# Altium PCB PCB_CSN_V4_2.PcbDoc
Units mil, origin at the board's own origin, x right, y up, seen from the top; angles counter-clockwise.
Board outline 3160 x 2075 mil, 2 copper layers (Top Layer, Bottom Layer); 92 components, 56 nets, 313 pads, 33 vias.
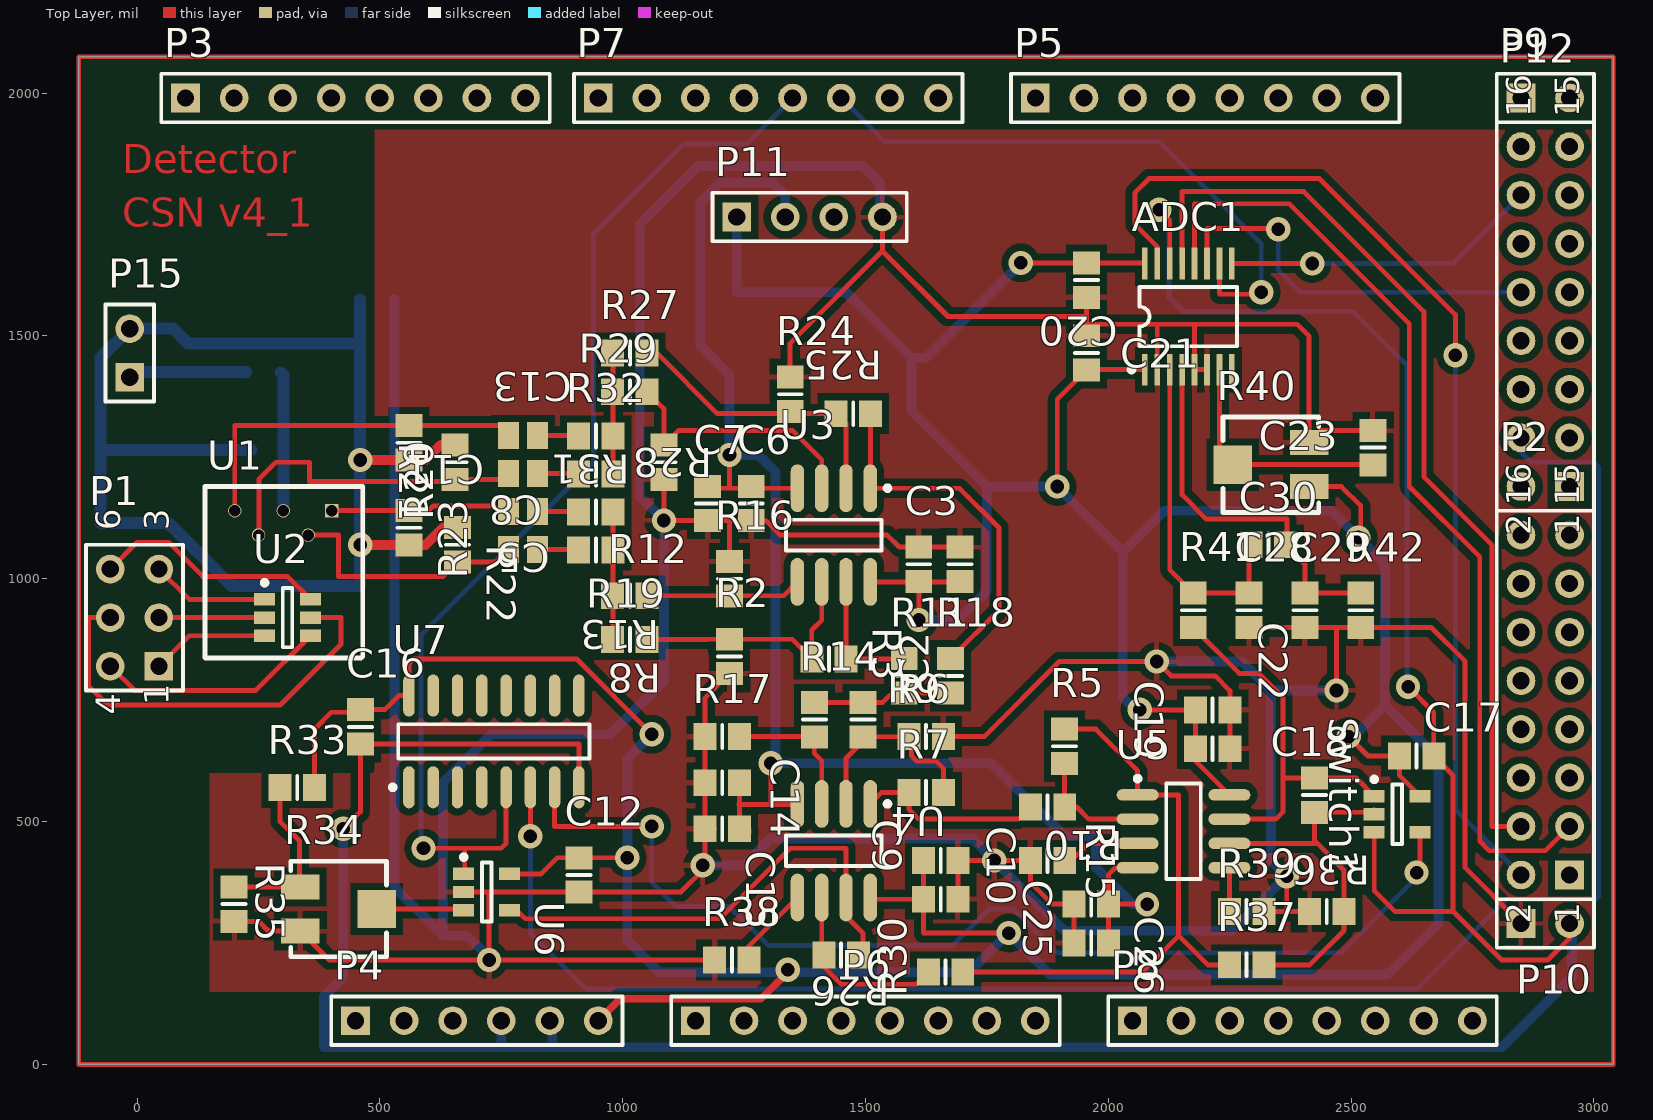
[diagram p0: Top Layer view]
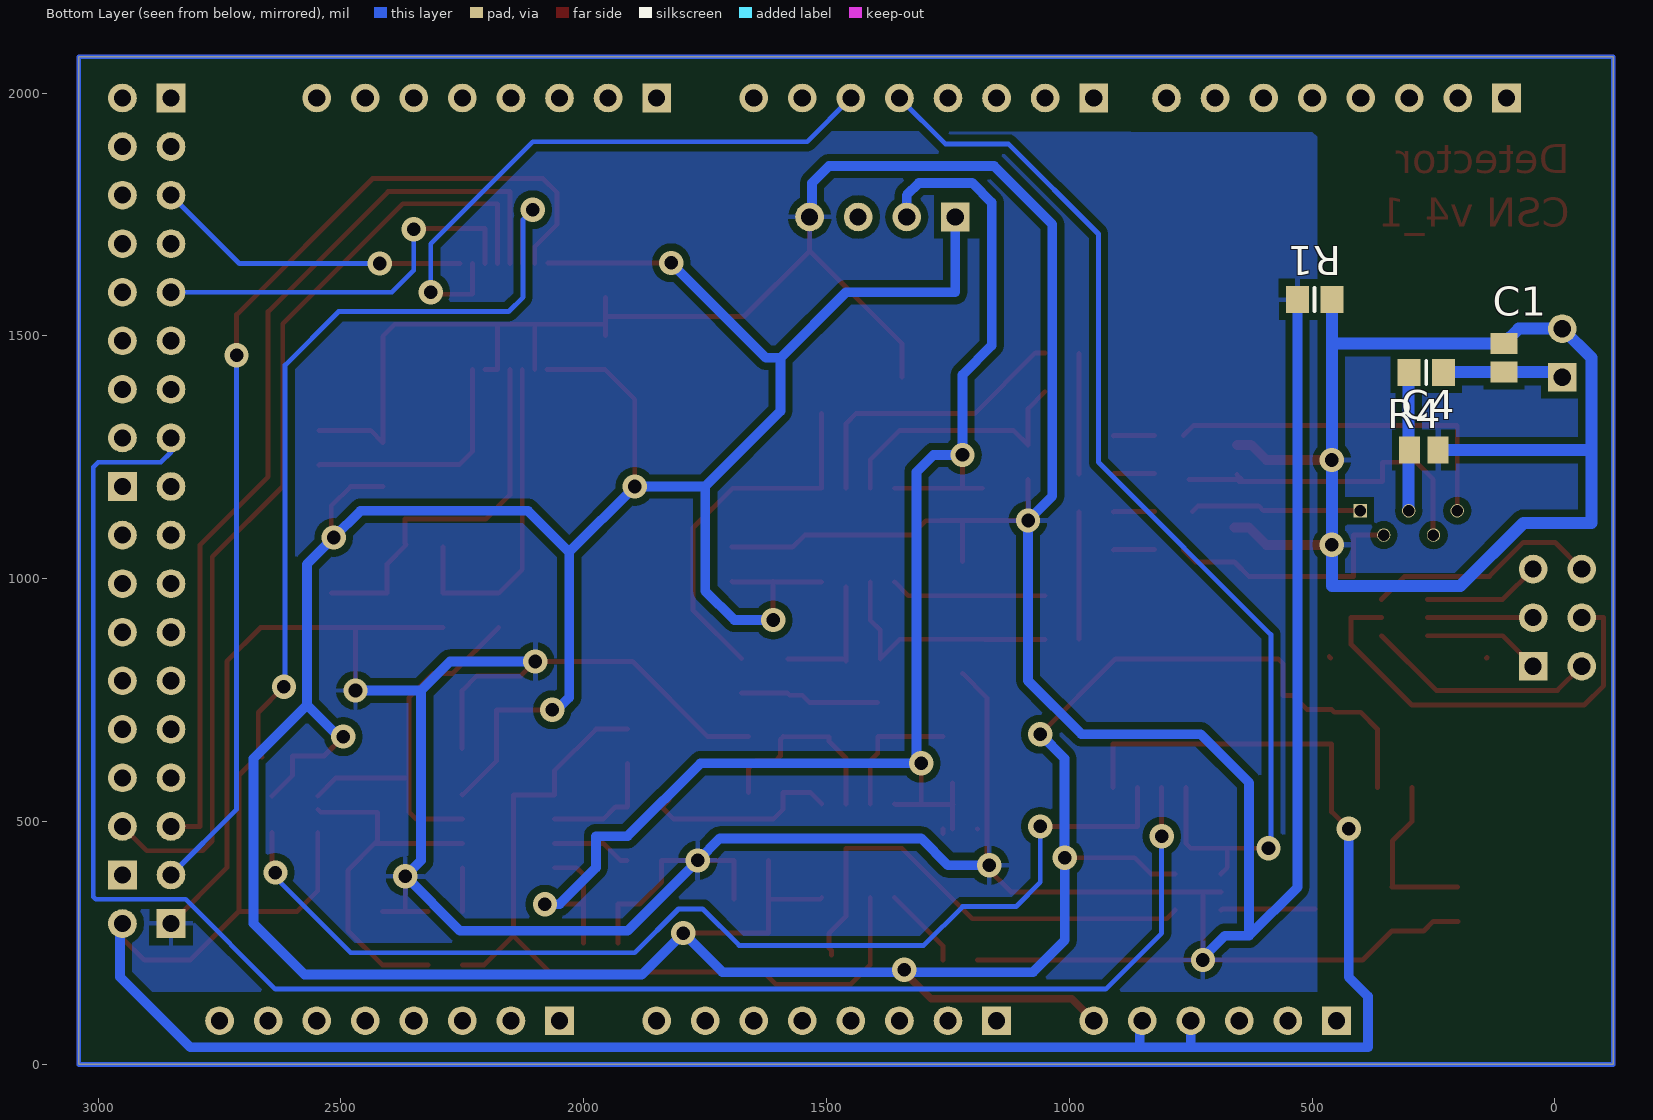
[diagram p1: Bottom Layer view, seen from below]

## Layer stack, top to bottom
Top Layer: signal copper 1.4
Dielectric: dielectric 12.6, FR-4, Dk 4.8
Bottom Layer: signal copper 1.4

## Board outline
-120,0 -120,2075 3040,2075 3040,0 -120,0

## Design rules (kind name [scope] priority, off if disabled: settings)
Clearance Clearance_1 [InPolygon] p1: gap=15
Clearance [InNetClass('All Nets') vs InNetClass('All Nets')] p2: gap=5
ComponentClearance ComponentClearance_1 [All] p1: gap=10 collisioncheckmode=3 verticalgap=10 showdistances=FALSE
PolygonConnect [All] p1: connectstyle=Relief reliefconductorwidth=10 reliefentries=4 polygonreliefangle="90 Angle"
RoutingVias [All] p1: holewidth=28 width=50 viastyle="Through Hole" minholewidth=28 minwidth=50 maxholewidth=28 maxwidth=50
SilkscreenOverComponentPads [All] p1: minsilkscreentomaskgap=10
SolderMaskExpansion [All] p1: expansion=4
Width Width_2 [(InNet('-5') OR InNet('+5') OR InNet('GND') OR InNet('DGND'))] p1: maxlimit=20 minlimit=10 preferedwidth=15 minimp=50.000000 maximp=50.000000 favimp=50.000000
Width [(InNet('70_GND') OR InNet('+70V') OR InNet('NetC4_2'))] p2: maxlimit=25 minlimit=20 preferedwidth=20 minimp=50.000000 maximp=50.000000 favimp=50.000000
Width Width_1 [All] p3: maxlimit=10 minlimit=10 preferedwidth=10
26 further rules are at their usual default settings.

## Classes and differential pairs
net class potencia: +5 -5 GND
component class Logica_ADC: C16 C17 C18 C19 C20 C21 C22 C23 C25 C26 C28 C29 C30 P2 P3 P4 P5 P6 P7 P8 P9 P10 P11 P12 R36 R37 R39 R40 R41 R42 Switch1 U7
component class Acond_Elec: C1 C2 C3 C4 C5 C6 C7 C8 C9 C10 C11 C12 C13 C14 C15 P1 P15 R1 R2 R3 R4 R5 R6 R7 R8 R9 R10 R11 R12 R13 R14 R15 R16 R17 R18 R19 R20 R21 R22 R23 R24 R25 R26 R27 R28 R29 R30 R31 R32 R33 R34 R35 R38 U1 U2 U3 U4 U5 U6
net class analog: GND NetC18_2 NetR26_2 NetR33_2 NetR34_W
net class digital: DGND NetADC1_9 NetADC1_10 NetADC1_11 NetADC1_12 NetADC1_13 NetADC1_15 NetP12_4 NetSwitch1_4

## Components (designator, comment, footprint, x,y, rotation, side; value= is the part's Value field where it differs from the comment)
ADC1 "ADS8329" PW-R-PDSO-G16 2165,1540 r0 top
C1 "Cap" C0805 105,1455 r270 bottom
C2 "Cap" 6-0805_N 1695,1030 r270 top
C3 "Cap Pol3" 6-0805_N 1610,1030 r90 top
C4 "Cap" C0805 270,1265 r0 bottom
C5 "Cap" C0805 795,1138.33 r0 top locked
C6 "Cap" 6-0805_N 1265,1155 r90 top
C7 "Cap Pol3" 6-0805_N 1175,1155 r90 top
C8 "Cap" C0805 795,1060 r0 top locked
C9 "Cap Pol3" 6-0805_N 1655,420 r0 top
C10 "Cap" 6-0805_N 1655,340 r180 top
C11 "Cap" C0805 795,1216.67 r0 top locked
C12 "Cap" 6-0805_N 910,390 r270 top
C13 "Cap" C0805 795,1295 r0 top locked
C14 "Cap" 6-0805_N 1205,580 r180 top
C15 "Cap Pol3" 6-0805_N 1205,485 r0 top
C16 "Cap" 6-0805_N 460,695 r270 top
C17 "Cap" 6-0805_N 2635,635 r180 top
C18 "Cap" 6-0805_N 2425,554.57 r90 top
C19 "Cap" 6-0805_N 2215,650 r180 top
C20 "Cap Pol3" 6-0805_N 1955,1615 r270 top
C21 "Cap Pol3" 6-0805_N 1955,1465 r90 top
C22 "Cap Pol3" 6-0805_N 2215,730 r0 top
C23 "Cap Pol3" 6-0805_N 2545,1270 r90 top
C25 "Cap" 6-0805_N 1965,330 r180 top
C26 "Cap Pol3" 6-0805_N 1965,250 r0 top
C28 "Cap" 6-0805_N 2290,935 r90 top
C29 "Cap" 6-0805_N 2405,935 r90 top
C30 "Cap" 6-0805_N 2330,1070 r180 top
P1 "Header 3X2A" HDR2X3_CEN 45,820 r90 top
P2 "Header 8X2" HDR2X8 2950,390 r90 top
P3 "Header 8" HDR1X8 100,1990 r0 top
P4 "Header 6" HDR1X6 450,90 r0 top
P5 "Header 8" HDR1X8 1850,1990 r0 top
P6 "Header 8" HDR1X8 1150,90 r0 top
P7 "Header 8" HDR1X8 950,1990 r0 top
P8 "Header 8" HDR1X8 2050,90 r0 top
P9 "Header 2" HDR1X2 2850,1990 r0 top
P10 "Header 2" HDR1X2 2850,290 r0 top
P11 "Header 4" HDR1X4 1235,1745 r0 top
P12 "Header 8X2" HDR2X8 2950,1190 r90 top
P15 "Header 2" HDR1X2 -15,1415 r90 top
R1 "Res3" 6-0805_N 495,1575 r180 bottom
R2 "Res3" 6-0805_N 1220,840 r90 top
R3 "Res3" 6-0805_N 1425,835 r180 top
R4 "Res3" 6-0805_N 265,1425 r180 bottom
R5 "Res3" 6-0805_N 1910,655 r90 top
R6 "Res3" 6-0805_N 1625,675 r180 top
R7 "Res3" 6-0805_N 1625,560 r0 top
R8 "Res3" 6-0805_N 1015,875 r0 top
R9 "Res3" 6-0805_N 1495,710 r270 top
R10 "Res3" 6-0805_N 1875,530 r0 top
R11 "Res3" 6-0805_N 1580,800 r270 top
R12 "Res3" 6-0805_N 945,1137.43 r0 top locked
R13 "Res3" 6-0805_N 1015,965 r0 top
R14 "Res3" 6-0805_N 1395,710 r270 top
R15 "Res3" 6-0805_N 1875,420 r0 top
R16 "Res3" 6-0805_N 1220,1000 r270 top
R17 "Res3" 6-0805_N 1205,675 r0 top
R18 "Res3" 6-0805_N 1675,800 r270 top
R19 "Res3" 6-0805_N 945,1059.09 r0 top locked
R20 "Res3" 6-0805_N 560,1280 r90 top locked
R21 "Res3" 6-0805_N 655,1240 r270 top locked
R22 "Res3" 6-0805_N 660,1070 r270 top locked
R23 "Res3" 6-0805_N 560,1105 r90 top locked
R24 "Res3" 6-0805_N 1345,1380 r270 top
R25 "Res3" 6-0805_N 1475,1340 r180 top
R26 "Res3" 6-0805_N 1450,225 r0 top
R27 "Res3" 6-0805_N 1015,1465 r0 top
R28 "Res3" 6-0805_N 945,1215.76 r0 top locked
R29 "0" 6-0805_N 1015,1385 r0 top
R30 "Res3" 6-0805_N 1665,190 r180 top
R31 "Res3" 6-0805_N 1085,1240 r90 top
R32 "Res3" 6-0805_N 945,1294.09 r0 top locked
R33 "Res3" 6-0805_N 330,570 r180 top
R34 "RPot SM" POT4MM-2 415,320 r0 top
R35 "Res3" 6-0805_N 200,330 r90 top
R36 "Res3" 6-0805_N 2450,315 r180 top
R37 "Res3" 6-0805_N 2285,205 r0 top
R38 "Res3" 6-0805_N 1225,215 r0 top
R39 "Res3" 6-0805_N 2285,315 r180 top
R40 "RPot SM" POT4MM-2 2335,1235 r180 top
R41 "Res3" 6-0805_N 2175,935 r90 top
R42 "Res3" 6-0805_N 2520,935 r90 top
Switch1 "SN74LVC1G66DBVR" SOT23-5_N 2595,515 r0 top
U1 "MPPC_S10985" S10985_HAM 140,1190 r0 top
U2 "LM73CIMK-0" MK06A_N 310,920 r0 top
U3 "AD8002" SO-8_M 1435,1090 r270 top
U4 "AD8002" SO-8_M 1435,440 r270 top
U5 "THS4062" S8_N 2155,480 r0 top
U6 "ADCMP600" SOT23-5_N 720,355 r0 top
U7 "SN74LS279AD" D016_N 735,665 r90 top

## Footprints (in the part's own frame and the unit in brackets; to place one, negate y for a bottom-side part, rotate by r counter-clockwise, add the part's x,y. Pads: shape width x height; smd on the part's side, far side on the other; paste and mask are expansions set on the pad)
6-0805_N [mm] "Chip Resistor, Body 2.0x1.2mm, IPC Medium Density"
  rect 1.2x1.4 smd: 1(-0.9,0) 2(0.9,0)
  silkscreen extent 0,-0.6 0,0.6, body extent -1.07,-0.7 1.07,0.7, height 0.7
C0805 [mm] "Chip Capacitor, Body 2.0x1.3mm, IPC High Density"
  rect 1.1x1.4 smd: 1(-0.75,0) 2(0.75,0)
  body extent -1.1,-0.72 1.1,0.72, height 1.4
D016_N [mm] "SOIC, 16-Leads, Body 9.9x3.9mm, Pitch 1.27mm, IPC Medium Density"
  oval 2.2x0.6 smd: 1(-2.4,4.445) 2(-2.4,3.175) 3(-2.4,1.905) 4(-2.4,0.635) 5(-2.4,-0.635) 6(-2.4,-1.905) 7(-2.4,-3.175) 8(-2.4,-4.445) 9(2.4,-4.445) 10(2.4,-3.175) 11(2.4,-1.905) 12(2.4,-0.635) 13(2.4,0.635) 14(2.4,1.905) 15(2.4,3.175) 16(2.4,4.445)
  silkscreen extent -2.52,-5 0.9,5.42, body extent -1.95,-4.95 1.95,4.95, height 1.75
HDR1X2 [mm] "Connector; Header; 2 Position"
  rect 1.5x1.5 hole 0.9: 1(0,0)
  round 1.5 hole 0.9: 2(2.54,0)
  silkscreen extent -1.27,-1.27 3.81,1.27
HDR1X4 [mm] "Connector; Header; 4 Position"
  rect 1.5x1.5 hole 0.9: 1(0,0)
  round 1.5 hole 0.9: 2(2.54,0) 3(5.08,0) 4(7.62,0)
  silkscreen extent -1.27,-1.27 8.89,1.27
HDR1X6 [mm] "Connector; Header; 6 Position"
  rect 1.5x1.5 hole 0.9: 1(0,0)
  round 1.5 hole 0.9: 2(2.54,0) 3(5.08,0) 4(7.62,0) 5(10.16,0) 6(12.7,0)
  silkscreen extent -1.27,-1.27 13.97,1.27
HDR1X8 [mm] "Connector; Header; 8 Position"
  rect 1.5x1.5 hole 0.9: 1(0,0)
  round 1.5 hole 0.9: 2(2.54,0) 3(5.08,0) 4(7.62,0) 5(10.16,0) 6(12.7,0) 7(15.24,0) 8(17.78,0)
  silkscreen extent -1.27,-1.27 19.05,1.27
HDR2X3_CEN [mm] "Connector; Header; 3x2 Position"
  rect 1.5x1.5 hole 0.9: 1(0,0)
  round 1.5 hole 0.9: 2(2.54,0) 3(5.08,0) 4(0,2.54) 5(2.54,2.54) 6(5.08,2.54)
  silkscreen extent -1.27,-1.27 6.35,3.81
HDR2X8 [mm] "Connector; Header; 8x2 Position"
  rect 1.5x1.5 hole 0.9: 1(0,0)
  round 1.5 hole 0.9: 2(0,2.54) 3(2.54,0) 4(2.54,2.54) 5(5.08,0) 6(5.08,2.54) 7(7.62,0) 8(7.62,2.54) 9(10.16,0) 10(10.16,2.54) 11(12.7,0) 12(12.7,2.54) 13(15.24,0) 14(15.24,2.54) 15(17.78,0) 16(17.78,2.54)
  silkscreen extent -1.27,-1.27 19.05,3.81
MK06A_N [mm] "SOT23, 6-Leads, Body 3.0x1.7mm, Pitch 0.95mm, Lead Span 2.9mm, IPC Medium Density"
  rect 1.1x0.65 smd: 1(-1.2,0.95) 2(-1.2,0) 3(-1.2,-0.95) 4(1.2,-0.95) 5(1.2,0) 6(1.2,0.95)
  silkscreen extent -1.32,-1.55 0.25,1.95, body extent -0.9,-1.55 0.9,1.55, height 1
POT4MM-2 [mm] "Square Trimming Potentiometer"
  rect 2x1.3 smd: CCW(-2,-1.15) CW(-2,1.15)
  rect 2x2 smd: W(2,0)
  silkscreen extent -2.5,-2.5 2.5,2.5
PW-R-PDSO-G16 [mm]
  rect 0.3x1.65 smd: 1(-2.275,-2.775) 2(-1.625,-2.775) 3(-0.975,-2.775) 4(-0.325,-2.775) 5(0.325,-2.775) 6(0.975,-2.775) 7(1.625,-2.775) 8(2.275,-2.775) 9(2.275,2.775) 10(1.625,2.775) 11(0.975,2.775) 12(0.325,2.775) 13(-0.325,2.775) 14(-0.975,2.775) 15(-1.625,2.775) 16(-2.275,2.775)
  silkscreen extent -3.1,-2.9 2.55,1.55
S8_N [mm] "SOIC, 8-Leads, Body 4.9x3.9mm, Pitch 1.27mm, IPC Medium Density"
  oval 2.2x0.6 smd: 1(-2.4,1.905) 2(-2.4,0.635) 3(-2.4,-0.635) 4(-2.4,-1.905) 5(2.4,-1.905) 6(2.4,-0.635) 7(2.4,0.635) 8(2.4,1.905)
  silkscreen extent -2.52,-2.5 0.9,2.88, body extent -2,-2.5 2,2.5, height 1.76
S10985_HAM [mm]
  rect 0.7x0.7 hole 0.6: 1(6.64,-1.27)
  round 0.7 hole 0.6: 2(5.4,-2.54) 3(4.1,-1.27) 4(2.8,-2.54) 5(1.56,-1.27)
  Top Layer lines w0.254: 0,-8.95 0.025,-8.975 ; 8.175,-8.975 8.25,-8.9
  silkscreen extent 0,-8.97 8.25,0
SO-8_M [mm] "SOIC, 8-Leads, Body 4.9x3.9mm, Pitch 1.27mm, IPC Low Density"
  oval 2.5x0.7 smd: 1(-2.45,1.905) 2(-2.45,0.635) 3(-2.45,-0.635) 4(-2.45,-1.905) 5(2.45,-1.905) 6(2.45,-0.635) 7(2.45,0.635) 8(2.45,1.905)
  silkscreen extent -2.57,-2.5 0.8,2.93, body extent -2,-2.5 2,2.5, height 1.75
SOT23-5_N [mm] "SOT23, 5-Leads, Body 2.9x1.6mm, Pitch 0.95mm, Lead Span 2.8mm, IPC Medium Density"
  rect 1.1x0.65 smd: 1(-1.2,0.95) 2(-1.2,0) 3(-1.2,-0.95) 4(1.2,-0.95) 5(1.2,0.95)
  silkscreen extent -1.32,-1.55 0.25,1.95, body extent -0.9,-1.55 0.9,1.55, height 1.45

## Part data
C1 C2 C4 C5 C6 C8 C10 C11 C12 C13 C14 C16 C17 C18 C19 C25 C28 C29 C30: "Capacitor"
C3 C7 C9 C15 C20 C21 C22 C23 C26: "Polarized Capacitor (Surface Mount)"
P1: "Header, 3-Pin, Dual row"
P2 P12: "Header, 8-Pin, Dual row"
P3 P5 P6 P7 P8: "Header, 8-Pin"
P4: "Header, 6-Pin"
P9 P10 P15: "Header, 2-Pin"
P11: "Header, 4-Pin"
R1 R2 R3 R4 R5 R6 R7 R8 R9 R10 R11 R12 R13 R14 R15 R16 R17 R18 R19 R20 R21 R22 R23 R24 R25 R26 R27 R28 R30 R31 R32 R33 R35 R36 R37 R38 R39 R41 R42: "Resistor"
R29: library part Res3, "Resistor"
R34 R40: "Square Trimming Potentiometer"
U2: "2.7V, 11- to 14- Bit Digital Temperature Sensor with 2-Wire Interface, 6-pin Tiny SOT23"
U3 U4: library part AD8002AR, "Dual 600MHz, 50mW Current Feedback Amplifier"
U5: library part LT1253CS8, "Low Cost Dual Video Amplifier"
U7: "Quadruple S-R Latches"

## Via types
v1: diameter 50, hole 28, Top Layer to Bottom Layer, 33 vias

## Nets (pads, with @x,y where several pads share a name; then routed paths per layer and width w, separated by ;. In a path a pad name is that pad's centre, name@x,y a point inside that pad or via, vN(x,y) a via of type N, cw(c..) or ccw(c..) an arc to the next point about the centre after c; other vN are vias at no path point)
70_GND: C1.1 C4.1 P15.2 R1.2 R20.1 R21.1 R22.1 R23.1 | length 2819.1
  Top Layer w20: v1(459.57,1244.57) R20.1 594.57,1244.57 625.43,1275.43 R21.1 ; v1@465,1070 465.43,1069.57 R23.1 594.57,1069.57 630.43,1105.43 R22.1
  Bottom Layer w25: C4.1@235.47,1265 -75,1265 ; R1.2 459.57,1484.57 ; -75,1265 -75,1115 65,1115 195,985 459.53,985 459.53,1484.53 ; -75,1265 -75,1455 P15.2 74.53,1515 C1.1 459.53,1484.53
  other v1: 459.57,1070
+5: ADC1.1 ADC1.16 C2.2 C3.1 C9.1 C10.2 C12.1 C16.1 C17.2 C19.2 C20.1 C21.1 C22.1 P4.6 P11.1 R33.1 R40.CW Switch1.5 U3.8 U4.8 U5.8 U6.5 U7.16 | length 9763.2
  Top Layer w10: R33.1 365.43,690.43 400,725 454.57,725 C16.1 510.43,730.43 539.49,759.49 U7.16 560,825 570,835 905,835 v1(1060,680) ; U6.5@782.24,392.4 832.4,392.4 865.43,425.43 C12.1 v1(1009.57,425.43) ; U4.8 1513.54,340 C10.2 ; U3.8 C3.1@1610,993.54 ; v1(1610,915) C3.1@1610,993.54 ; C3.1 C3.1@1610,993.54 ; C9.1 C10.2 ; C2.2 1693.98,993.54 C3.1@1610,993.54 ; v1(1795,270.43) 1619.57,270.43 C10.2 ; v1(1820,1650.43) C20.1 ADC1.16@2074.25,1650.43 ; v1@1895,1195.87 1895,1369.57 C21.1 1956.18,1430.75 ADC1.1 ; v1(2065,730) 2065,720 2070,715 2085,730 C22.1 C19.2 2179.57,624.92 U5.8 U5.8@2250.43,555.94 ; R40.CW 2480.28,1189.72 2520,1150 2520,1090 v1(2515,1085) ; v1(2495,675) 2535,635 C17.2 2599.57,595.08 Switch1.5
  Top Layer w15: P4.6 995,135 1285,135 v1@1340,190
  Bottom Layer w20: v1(1009.57,425.43) 1009.57,255.43 1075,190 1714.57,190 v1(1795,270.43) 1880.43,185 2575,185 2680,290 2680,315 ; v1@1010,425.87 1010,630 v1(1060,680) ; P11.1 1235,1590 1460,1590 1595,1455 ; v1(1610,915) 1690,915 1750,975 1750,1190 ; v1(1820,1650.43) 1624.57,1455 1595,1455 ; v1@2065,720 2030,755 2030,1055 ; v1(2495,675) 2505,675 2570,740 ; 2680,320 2680,630 2570,740 ; 1595,1455 1595,1345 1750,1190 ; 1750,1190 v1(1895,1190) 2030,1055 ; 2030,1055 2115,1140 2460,1140 v1(2515,1085) 2570,1030 2570,740
  other v1: 1340,195
+70V: C1.2 P15.1 R4.2 | length 244.1
  Bottom Layer w25: P15.1 -4.53,1425.47 C1.2 224.09,1425.47 R4.2@224.57,1425
-5: C6.2 C7.2 C14.1 C15.2 C25.1 C26.2 P11.2 U3.4 U4.4 U5.4 | length 3270.8
  Top Layer w10: C7.2@1178.98,1186.46 1220,1186.46 ; v1(1220,1255) 1220,1186.46 ; 1240,535 1240.43,535 ; C15.2 1240.43,535 ; C14.1 1240.43,535 ; C15.2@1260.43,475 C15.2@1260.43,485 ; v1(1305,620) 1305,535 ; U4.4 1358.54,535 1305,535 ; U3.4 1220,1186.46 ; C26.2 C25.1 ; U5.4 2015,405 2000.43,390.43 C25.1 ; v1(2080,330) C25.1 ; 1240.43,535 1305,535
  Bottom Layer w20: v1(1305,620) 1760,620 1910,470 1975,470 1975,405 2050,330 v1(2080,330) ; v1@1315,630 1315,1220 1280,1255 v1(1220,1255) 1220,1420 1160,1480 1160,1775 1200,1815 1310,1815 1335,1790 P11.2
DGND: ADC1.14 C16.2 C17.1 P4.4 P4.5 P10.2 Switch1.3 U7.8 | length 6699.1
  Top Layer w10: v1(425,485) 460,520 C16.2 910,659.57 U7.8 ; v1(2105,1760) 2126.61,1738.39 ADC1.14 ; Switch1.3 2547.76,357.24 2590,315 2710,315 ; v1(2617.5,777.5) 2670.43,724.57 C17.1 2710,595.43 2710,315 ; C17.1@2662.24,632.4 C17.1@2664.57,634.72 ; P10.2 2950,260 2905,215 2810,215 2710,315
  Bottom Layer w10: v1(2105,1760) 2125,1740 2125,1580 2155,1550 2505,1550 2615,1440 2615,780 v1(2617.5,777.5) v1@2620,775
  Bottom Layer w20: v1(425,485) 425,180 385,140 385,35 750,35 ; P4.4 750,35 ; P4.5@855,85 855,35 ; P10.2 2955,285 2955,180 2810,35 855,35 ; 750,35 855,35
GND: ADC1.2 ADC1.5 ADC1.6 C2.1 C3.2 C6.1 C7.1 C9.2 C10.1 C12.2 C14.2 C15.1 C19.1 C20.2 C21.2 C22.2 C23.2 C25.2 C26.1 C28.1 C29.1 P10.1 P11.4 R1.1 R2.1 R6.1 R15.1 R16.1 R17.1 R24.1 R31.1 R34.CCW R35.1 R36.2 R38.1 R39.1 R40.CCW R42.1 U6.2 | length 13603.4
  Top Layer w10: R35.1 250.43,294.57 270.28,274.72 R34.CCW 395.98,215 v1@730,215 ; U6.2@687.76,355 725,355 ; v1(725,215) v1@730,215 ; C12.2 C12.2@909.57,355 ; R31.1 v1(1085,1120) 1175,1120 1264.57,1120 C6.1 1295.43,1119.57 1325,1090 1545,1090 1569.57,1065.43 C3.2 C2.1 ; R38.1 v1@730,215 ; R2.1@1220,805 1170,755 1170,405 1120,355 C12.2@909.57,355 ; R16.1 1220,1119.78 ; R24.1 1345,1485 1535,1675 ; P11.4 1535,1675 ; R6.1 1745,675 1899.57,829.57 2070.43,829.57 ; C10.1 C9.2 v1(1765,420) R15.1 1839.57,375.43 1885,330 C25.2 C26.1 ; C21.2 C21.2@1955,1520 ; C20.2 1955,1540 ; ADC1.2 2101.02,1523.98 ; ADC1.6 ADC1.5 2177.8,1522.2 2176.02,1523.98 ; C19.1 C22.2 2250.43,769.57 2220,800 2129.57,800 v1(2100,829.57) v1@2080,829.57 ; C28.1 C29.1 2470,899.57 ; R39.1 2367.5,315 ; v1(2367.5,387.5) 2367.5,315 ; R36.2 2367.5,315 ; v1(2470,770) 2470,899.57 ; C23.2 2438.9,1305.43 R40.CCW 2413.74,1499.21 2388.98,1523.98 2176.02,1523.98 ; P10.1 2735,405 2735,830 2665.43,899.57 R42.1 2470,899.57 ; 725,355 C12.2@909.57,355 ; 725,355 725,230 735,220 v1@730,215 ; 1535,1675 1670,1540 1955,1540 ; C21.2@1955,1520 1955,1540 ; C21.2@1955,1520 1958.98,1523.98 2101.02,1523.98 ; 2070.43,829.57 v1@2080,829.57 ; 2070.43,829.57 2070,830 2079.57,830 v1@2080,829.57 ; 2101.02,1523.98 2176.02,1523.98
  Bottom Layer w20: R1.1 530.43,364.57 630,265 ; v1(725,215) 730,215 680,265 630,265 ; v1(1165,410) 1250,410 1305,465 1720,465 v1(1765,420) 1910,275 2255,275 v1(2367.5,387.5) 2335,420 2335,770 ; P11.4 1530,1750 1530,1815 1495,1850 1155,1850 1035,1730 1035,1170 v1(1085,1120) 1085,790 975,680 730,680 630,580 630,265 ; v1(2100,829.57) 2275.43,829.57 2335,770 ; v1(2470,770) 2335,770
NetADC1_3: ADC1.3 C28.2 C30.2 R41.2 | length 690.4
  Top Layer w10: ADC1.3 2126.61,1018.82 R41.2 C28.2 C30.2@2290,1065.43
NetADC1_4: ADC1.4 C29.2 C30.1 R42.2 | length 775.6
  Top Layer w10: ADC1.4 2152.2,1172.8 2202.2,1122.8 2367.8,1122.8 C30.1@2367.8,1072.36 ; C30.1 2405,1030.43 C29.2 R42.2
NetADC1_7: ADC1.7 C23.1 R40.W | length 496
  Top Layer w10: ADC1.7 2228.98,1262.28 R40.W 2544.57,1235 C23.1
NetADC1_9: ADC1.9 P12.14 | length 653.7
  Top Layer w10: ADC1.9 v1(2420,1649.25)
  Bottom Layer w10: v1(2420,1649.25) 2709.25,1649.25 P12.14
NetADC1_10: ADC1.10 P7.6 | length 1240.2
  Top Layer w10: ADC1.10 2228.98,1586.02 2311.02,1586.02 v1(2315,1590)
  Bottom Layer w10: P7.6 1540,1900 2105,1900 2315,1690 v1(2315,1590)
NetADC1_11: ADC1.11 P12.10 | length 823.3
  Top Layer w10: ADC1.11 2203.39,1721.61 2348.39,1721.61 v1(2350,1720)
  Bottom Layer w10: v1(2350,1720) 2350,1635 2395,1590 P12.10
NetADC1_12: ADC1.12 P2.3 | length 2006.6
  Top Layer w10: ADC1.12 2177.8,1772.2 2372.8,1772.2 2620,1525 2620,1190 2765,1045 2765,460 2785,440 2900,440 P2.3
NetADC1_13: ADC1.13 P2.4 | length 1926.1
  Top Layer w10: ADC1.13 2152.2,1797.2 2402.8,1797.2 2650,1550 2650,1210 2790,1070 2790,490 P2.4
NetADC1_15: ADC1.15 P2.2 | length 2162.7
  Top Layer w10: ADC1.15 2101.02,1683.98 2055,1730 2055,1795 2083.98,1823.98 2435,1823.98 2715,1543.98 v1(2715,1460)
  Bottom Layer w10: v1(2715,1460) 2715,525 P2.2
NetC4_2: C4.2 R4.1 U1.3 | length 287.5
  Bottom Layer w25: R4.1@295.43,1425 301.42,1419.01 U1.3
NetC5_1: C5.1 R23.2 U1.1 | length 353.6
  Top Layer w10: U1.1@401.85,1140.43 R23.2 600.43,1140.43 610,1150 735,1150 C5.1@746.67,1138.33
NetC5_2: C5.2 R12.1 | length 85.4
  Top Layer w10: C5.2 908.66,1138.33 R12.1
NetC8_1: C8.1 R22.2 U1.2 | length 520.7
  Top Layer w10: U1.2 415,1090 415,1005 630.43,1005 R22.2 740.04,1034.57 C8.1
NetC8_2: C8.2 R19.1 | length 85.4
  Top Layer w10: C8.2 908.66,1060 R19.1
NetC11_1: C11.1 R21.2 U1.4 | length 680.2
  Top Layer w10: U1.4@250.95,1090.71 250.95,1205 285.95,1240 355,1240 355,1200 R21.2@650.43,1200 ; R21.2@645.43,1205 R21.2@655,1214.57 ; R21.2 C11.1@753.37,1204.57
NetC11_2: C11.2 R28.1 | length 85.4
  Top Layer w10: C11.2 908.66,1216.67 R28.1
NetC13_1: C13.1 R20.2 U1.5 | length 748
  Top Layer w10: U1.5 201.42,1315.43 R20.2 745.04,1315.43 C13.1
NetC13_2: C13.2 R32.1 | length 85.4
  Top Layer w10: C13.2 908.66,1295 R32.1
NetC18_1: C18.1 R36.1 R37.2 Switch1.2 U5.6 | length 768.6
  Top Layer w10: U5.6 2430,455 ; R37.2 2415,205 2485.43,275.43 R36.1 2485.43,399.57 2430,455 ; Switch1.2@2547.76,525 2541.89,519.14 C18.1 2425,460 2430,455
NetC18_2: C18.2 R41.1 Switch1.1 U5.7 | length 799.9
  Top Layer w10: R41.1 2180,894.57 2269.57,805 2310,805 2360,755 2360,590 ; U5.7 2345,505 2360,520 2360,590 ; Switch1.1 2510.16,590 C18.2 2360,590
NetP1_1: P1.1 U2.3 | length 243.7
  Top Layer w10: P1.1 107.6,882.6 U2.3
NetP1_2: P1.2 U2.2 | length 217.8
  Top Layer w10: P1.2 U2.2
NetP1_3: P1.3 U2.1 | length 243.7
  Top Layer w10: P1.3 107.6,957.4 U2.1
NetP1_4: P1.4 U2.4 | length 479.6
  Top Layer w10: P1.4 -5,770 244.65,770 U2.4
NetP1_5: P1.5 U2.5 | length 891.1
  Top Layer w10: P1.5 -100,920 -100,780 -60,740 295,740 420,865 420,920 U2.5
NetP1_6: P1.6 U2.6 | length 483.7
  Top Layer w10: P1.6 0,1075 65,1075 135,1005 309.65,1005 U2.6
NetP7_5: P7.5 U6.1 U7.5 | length 2308.8
  Top Layer w10: v1(590,445) 750,445 760,455 U7.5 ; 675,445 675,405.16 U6.1@687.76,392.4
  Bottom Layer w10: v1(590,445) 605,445 585,465 585,885 940,1240 940,1710 1125,1895 1255,1895 P7.5
NetP12_4: P12.4 U7.6 | length 3713.8
  Top Layer w10: v1(810,470) U7.6
  Bottom Layer w10: v1(810,470) 810,270 925,155 2635,155 2820,340 3005,340 3010,345 3010,1230 3000,1240 2870.86,1240 2850,1260.86 P12.4
NetR2_2: R2.2 R3.2 R8.2 U3.6 | length 523.1
  Top Layer w10: R8.2 1174.57,875 1175,875.43 1349.13,875.43 R3.2 1389.57,894.57 1410,915 U3.6
NetR3_1: R3.1 R11.1 U3.7 | length 272.2
  Top Layer w10: R3.1@1460,830 U3.7@1460,983.11 ; R3.1 R11.1@1579.57,835
NetR5_1: R5.1 R10.2 U5.2 | length 250.2
  Top Layer w10: R5.1 1910,530.43 R10.2 1935,530 1960,505 U5.2
NetR5_2: R5.2 R30.1 R37.1 U5.1 | length 1215.1
  Top Layer w10: R30.1 2070,190 2145,265 ; R5.2 1974.57,690.43 2060.51,604.49 U5.1 2145,555 2145,265 ; R37.1 2205,205 2145,265
NetR6_2: R6.2 R7.2 R9.2 U4.2 | length 415.1
  Top Layer w10: U4.2 1460,630 1495,665 R9.2 1589.13,674.57 R6.2 1595,669.57 1595,635 1605,625 1645,625 1660.43,609.57 R7.2
NetR7_1: R7.1 R10.1 U4.1 | length 413.9
  Top Layer w10: U4.1 1533.54,560 R7.1 1589.57,525.43 1610,505 1814.57,505 R10.1 R10.1@1824.57,545
NetR8_1: R8.1 R12.2 R13.1 R19.2 | length 261.6
  Top Layer w10: R8.1@980.43,875.87 R19.2 R12.2
NetR9_1: R9.1 R11.2 R14.1 R18.2 | length 287.9
  Top Layer w10: R14.1 R9.1 1535.43,745.43 1550,760 1575.43,760 R11.2 R18.2
NetR13_2: R13.2 R16.2 U3.5 | length 321.4
  Top Layer w10: R13.2 1331.46,965 U3.5
NetR14_2: R14.2 R17.2 U4.3 | length 279.5
  Top Layer w10: R17.2@1260,675 1394.57,675 1394.57,640.43 1410,625 U4.3
NetR15_2: R15.2 U5.3 | length 164.6
  Top Layer w10: R15.2 1925,420 1960,455 U5.3
NetR18_1: R18.1 R25.1 U3.1 | length 763.5
  Top Layer w10: R25.1 1510.43,1186.89 U3.1 1693.54,1186.46 1775,1105 1775,935.43 R18.1
NetR24_2: R24.2 R25.2 R27.2 U3.2 | length 602.9
  Top Layer w10: R27.2 1070,1465 1195,1340 R25.2 1460,1319.57 U3.2
NetR26_1: R26.1 R30.2 U4.6 | length 385
  Top Layer w10: U4.6 1410,205 1450,165 1604.57,165 R30.2
NetR26_2: R26.2 U4.7 U6.4 | length 981.7
  Top Layer w10: U6.4@782.24,317.6 799.84,300 1200,300 1345,445 1460,445 U4.7 1460,305 1495,270 1495,240 1490,235 R26.2@1490,225
NetR27_1: R27.1 R28.2 R29.1 R32.2 | length 248.4
  Top Layer w10: R28.2 R32.2 R27.1@980.43,1464.13
NetR29_2: R29.2 R31.2 U3.3 | length 544.5
  Top Layer w10: R29.2 1085,1350.43 R31.2 1114.57,1305 1350,1305 1410,1245 U3.3
NetR33_2: R33.2 R34.CW R35.2 | length 357.5
  Top Layer w10: R35.2@200.16,365.28 R34.CW 334.57,366.97 334.57,460.43 295,500 ; 294.57,500.43 R33.2
NetR34_W: R34.W U6.3 | length 195
  Top Layer w10: R34.W 685.35,320 U6.3@687.76,317.6
NetR38_2: R38.2 U4.5 | length 169.8
  Top Layer w10: R38.2 1260.43,243.98 U4.5
NetR39_2: R39.2 U5.5 | length 90
  Top Layer w10: U5.5 2249.49,315.08 R39.2
NetSwitch1_4: Switch1.4 U7.7 | length 2249.2
  Top Layer w10: U7.7 860,490 v1(1060,490) ; v1(2635,395) 2642.24,402.24 Switch1.4
  Bottom Layer w10: v1(1060,490) 1060,375 1110,325 1220,325 1300,245 1680,245 1755,320 1805,320 1895,230 2480,230 v1@2639.74,389.74
pads on no net: ADC1.8 P2.1 P2.5 P2.6 P2.7 P2.8 P2.9 P2.10 P2.11 P2.12 P2.13 P2.14 P2.15 P2.16 P3.1 P3.2 P3.3 P3.4 P3.5 P3.6 P3.7 P3.8 P4.1 P4.2 P4.3 P5.1 P5.2 P5.3 P5.4 P5.5 P5.6 P5.7 P5.8 P6.1 P6.2 P6.3 P6.4 P6.5 P6.6 P6.7 P6.8 P7.1 P7.2 P7.3 P7.4 P7.7 P7.8 P8.1 P8.2 P8.3 P8.4 P8.5 P8.6 P8.7 P8.8 P9.1 P9.2 P11.3 P12.1 P12.2 P12.3 P12.5 P12.6 P12.7 P12.8 P12.9 P12.11 P12.12 P12.13 P12.15 P12.16 U7.1 U7.2 U7.3 U7.4 U7.9 U7.10 U7.11 U7.12 U7.13 U7.14 U7.15

## Polygon pours and split planes (outlines as drawn)
GND on Bottom Layer "gnd_bottom" (solid, remove dead copper, pour order 16): 500,1920 490,1910 490,150 3025,150 3000,175 3000,1925
70_GND on Bottom Layer "gnd_bottom" (solid, remove dead copper, pour order 41): -75,1525 455,1525 455,989.53 459.53,985 195,985 65,1115 -75,1115 -75,1520
GND on Top Layer "gnd_bottom" (solid, remove dead copper, pour order 18): 490,1925 490,605 485,600 150,600 150,150 3000,150 3000,1925

## Other copper
Top Layer:
  text "Detector" at -30,1835 h60
  text "CSN v4_1" at -30,1725 h60
Multi-Layer:
  the board outline again, w10

## Text inside footprints (layer, text, board x,y; h text height)
P1: Top Overlay "6" at -35,1100 h50 r90; Top Overlay "3" at 65,1100 h50 r90; Top Overlay "1" at 65,740 h50 r90; Top Overlay "4" at -35,720 h50 r90
P2: Top Overlay "2" at 2870,290 h50 r90; Top Overlay "1" at 2970,290 h50 r90; Top Overlay "15" at 2970,1150 h50 r90; Top Overlay "16" at 2870,1150 h50 r90
P12: Top Overlay "2" at 2870,1090 h50 r90; Top Overlay "1" at 2970,1090 h50 r90; Top Overlay "15" at 2970,1950 h50 r90; Top Overlay "16" at 2870,1950 h50 r90